# Altium PCB Demo.PcbDoc
Units mil, origin at the board's own origin, x right, y up, seen from the top; angles counter-clockwise.
Board outline 1205.03 x 1440.03 mil, 2 copper layers (Top Layer, Bottom Layer); 33 components, 22 nets, 134 pads, 9 vias.
Unrouted connection lines stored in the file: 21.
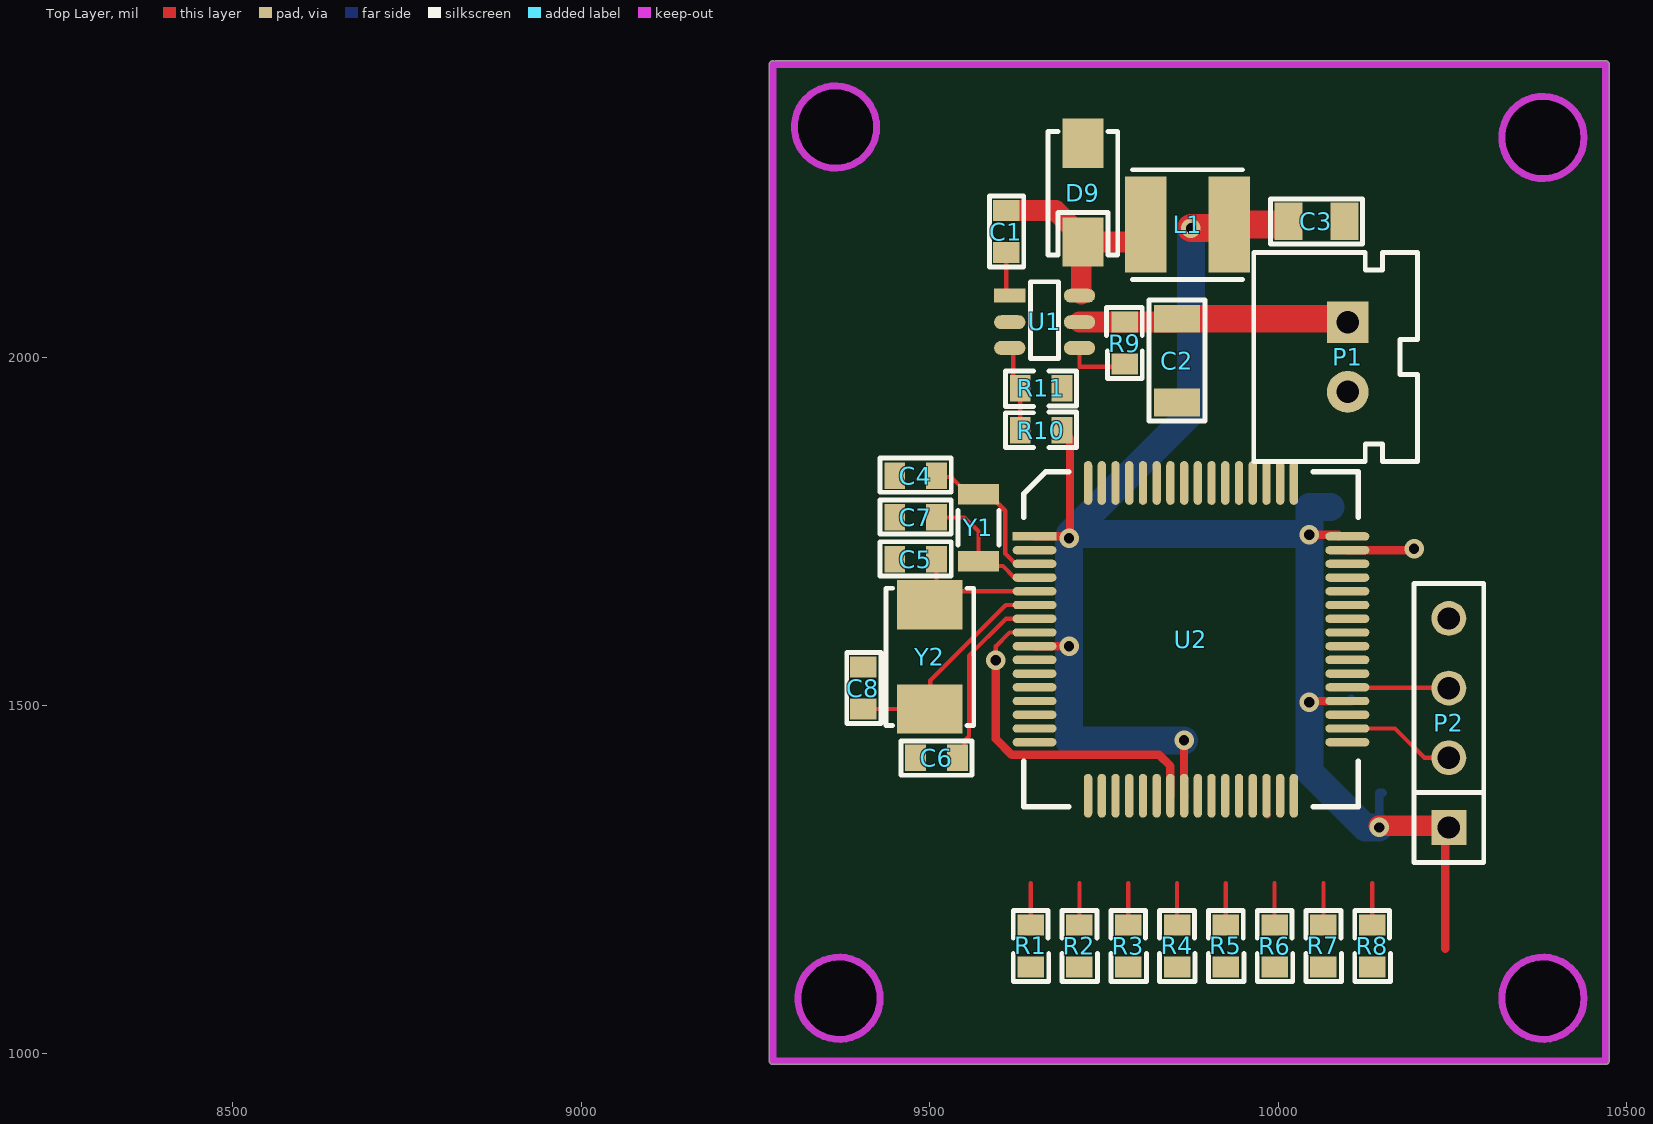
[diagram p0: Top Layer view]
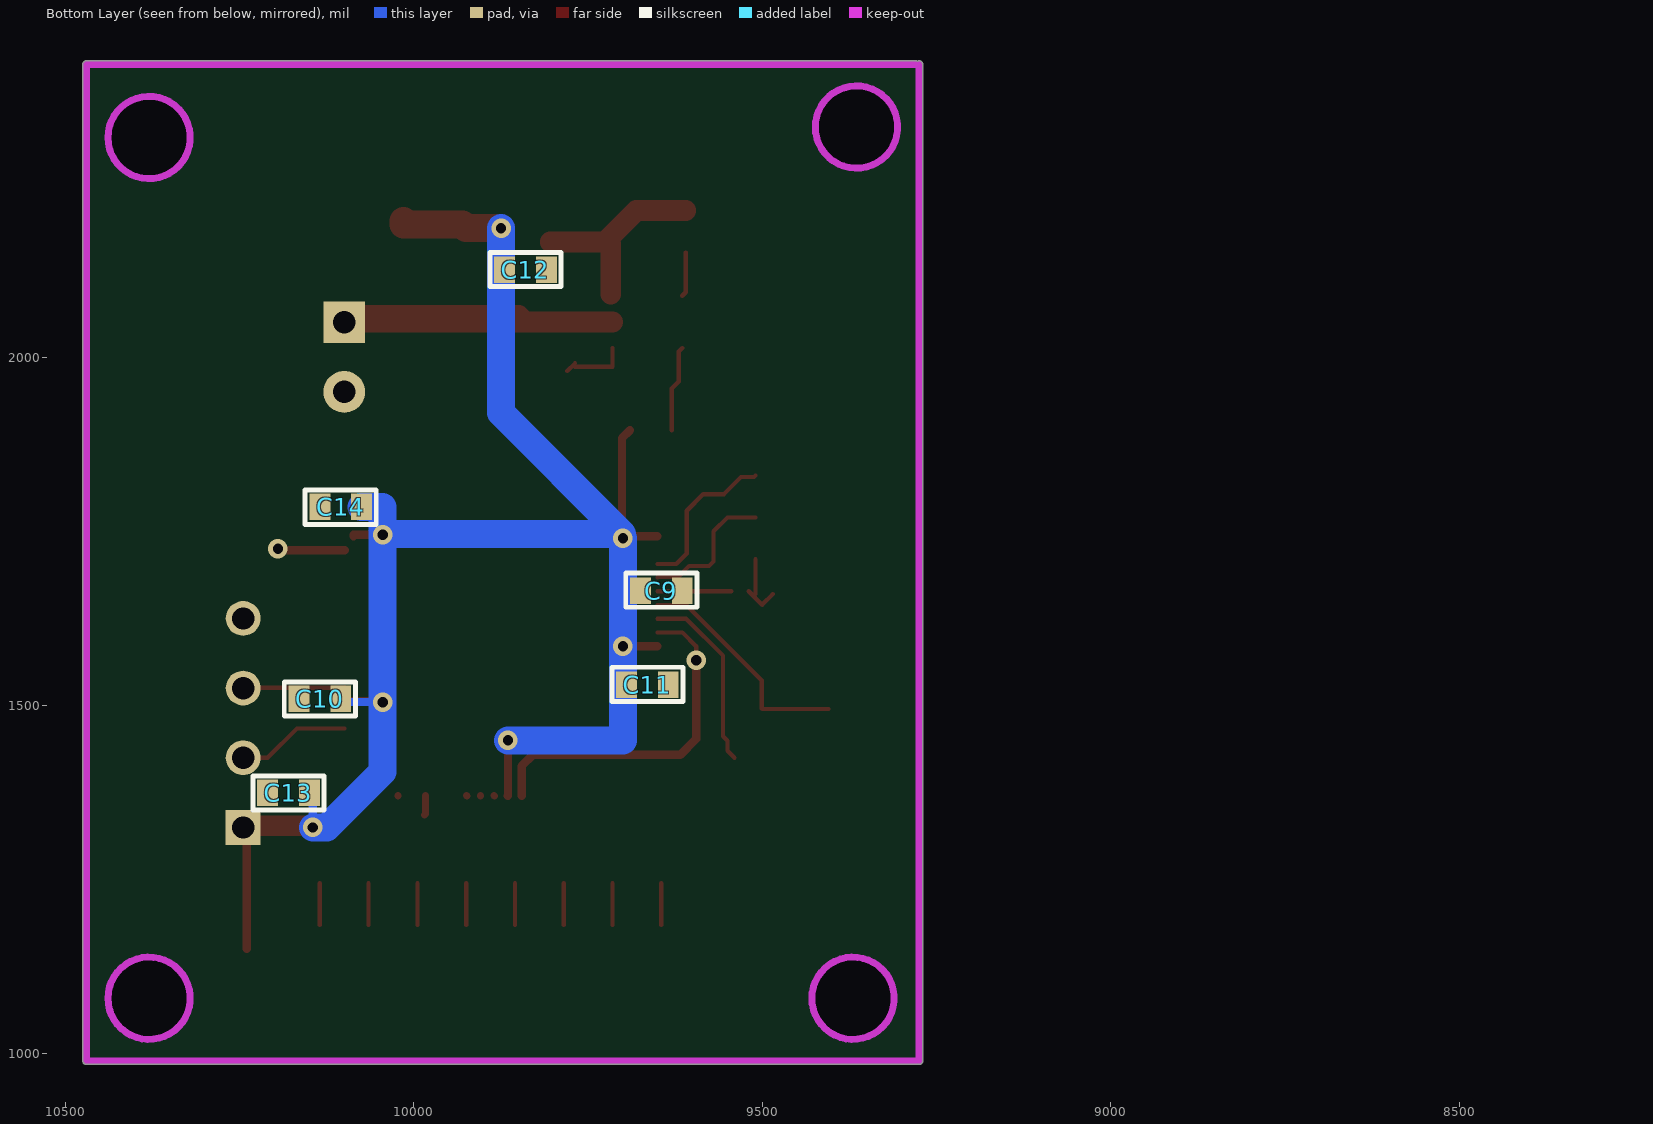
[diagram p1: Bottom Layer view, seen from below]
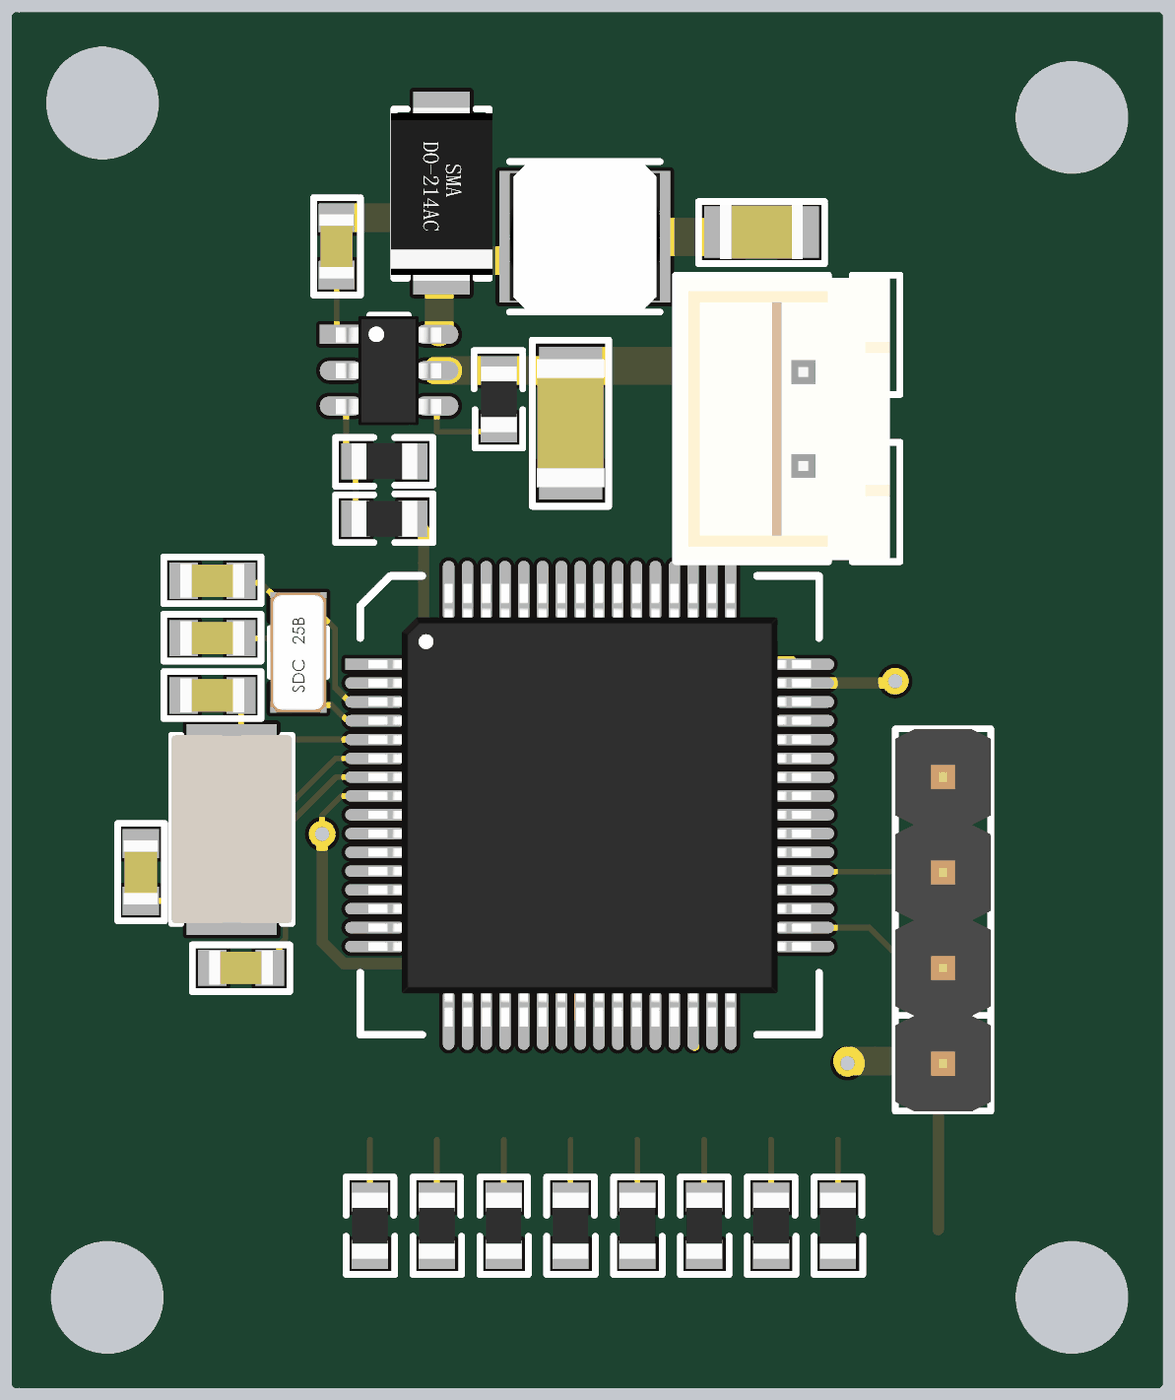
[diagram p2: 3D render of the assembled board from above, using the file's embedded part models]
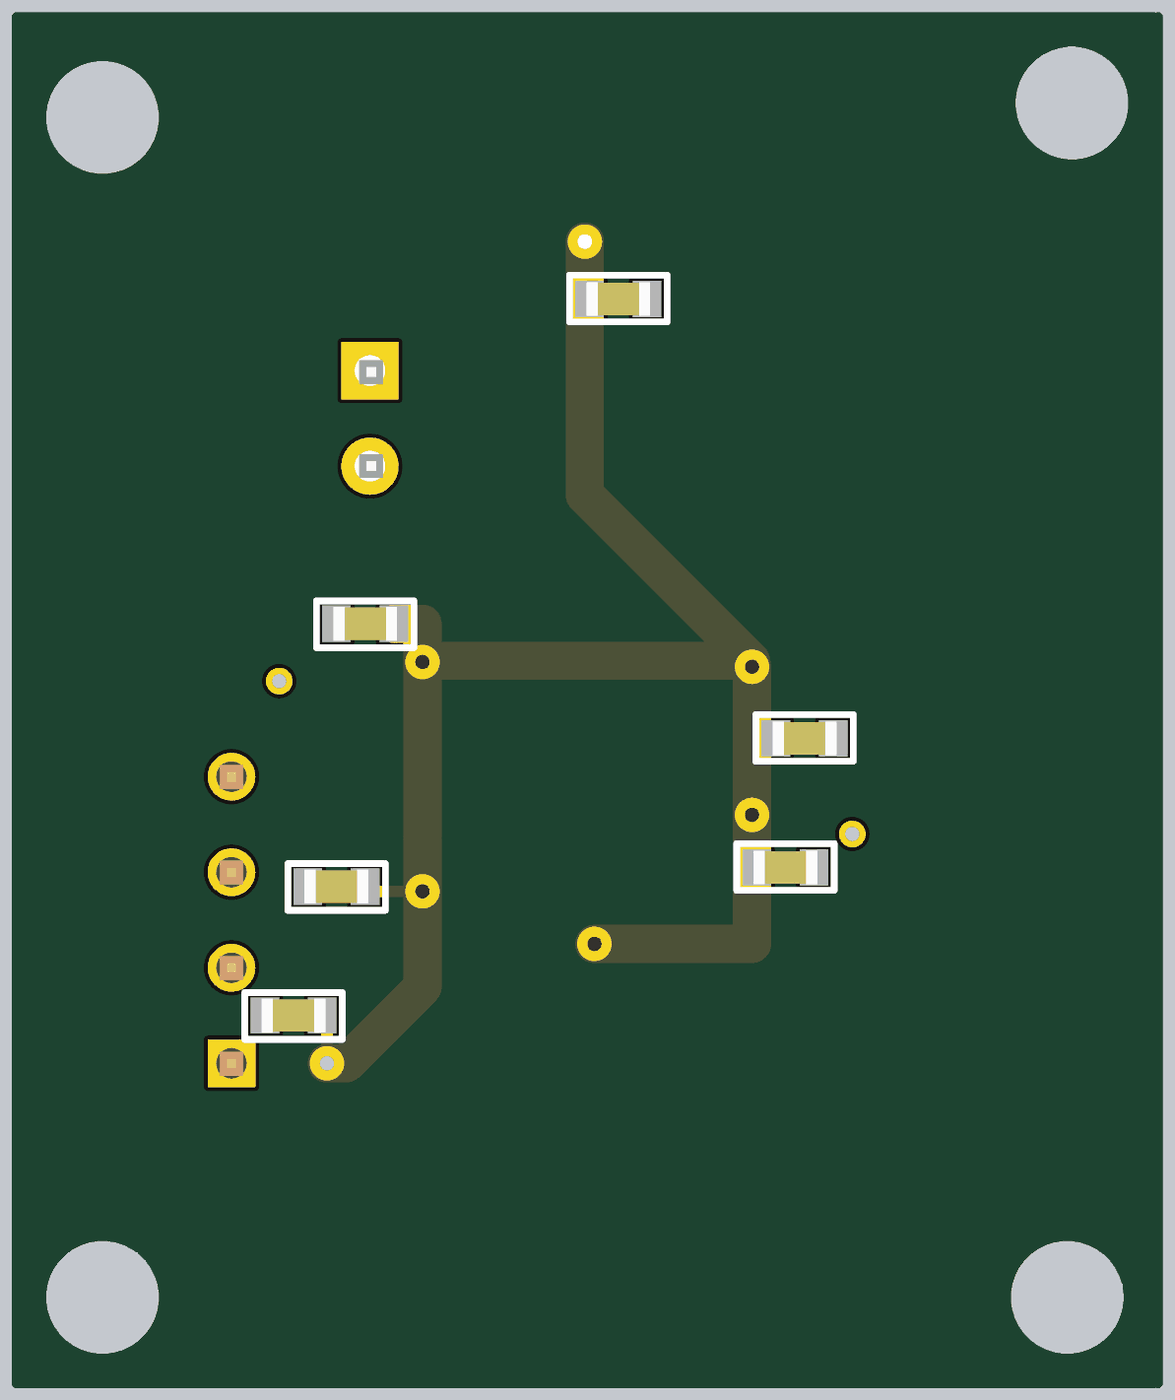
[diagram p3: 3D render of the assembled board from below, using the file's embedded part models]

## Layer stack, top to bottom
Top Solder: solder mask 0.4, Solder Resist, Dk 3.5
Top Layer: signal copper 1.4
Dielectric 1: dielectric 12.6, FR-4, Dk 4.8
Bottom Layer: signal copper 1.4
Bottom Solder: solder mask 0.4, Solder Resist, Dk 3.5

## Board outline
9269.99,990 ccw(c9275,990) 9277.5,985.65 ccw(c9280,990) 9280,984.99 10470,984.99 ccw(c10470,990) 10475.02,990 10475.01,2420 ccw(c10470,2420) 10470,2425.01 9280,2425.01 ccw(c9280,2420) 9277.5,2424.35 ccw(c9275,2420) 9269.99,2420
cut-out: 10320.94,1080 ccw(c10380,1080) 10380,1020.94 ccw(c10380,1080) 10439.06,1080 ccw(c10380,1080) 10380,1139.06 ccw(c10380,1080)
cut-out: 9310.94,1080 ccw(c9370,1080) 9370,1020.94 ccw(c9370,1080) 9429.06,1080 ccw(c9370,1080) 9370,1139.06 ccw(c9370,1080)
cut-out: 9305.94,2330 ccw(c9365,2330) 9365,2270.94 ccw(c9365,2330) 9424.06,2330 ccw(c9365,2330) 9365,2389.06 ccw(c9365,2330)
cut-out: 10320.94,2315 ccw(c10380,2315) 10380,2255.94 ccw(c10380,2315) 10439.06,2315 ccw(c10380,2315) 10380,2374.06 ccw(c10380,2315)

## Design rules (kind name [scope] priority, off if disabled: settings)
Clearance [All] p1: gap=6 ignorepadtopadclearanceinfootprint=FALSE
MinimumSolderMaskSliver [All] p1 off: minsoldermaskwidth=10
PolygonConnect [All] p1: connectstyle=Relief reliefconductorwidth=10 reliefentries=4 polygonreliefangle="90 Angle" airgapwidth=10
RoutingVias [All] p1: holewidth=28 width=50 viastyle="Through Hole" minholewidth=28 minwidth=50 maxholewidth=28 maxwidth=50
SilkToSilkClearance [All] p1 off: silktosilkclearance=10
SilkToSolderMaskClearance [IsPad] p1 off: minsilkscreentomaskgap=10 clearancetoexposedcopper=TRUE
SolderMaskExpansion [All] p1: expansion=4 istentingtop=FALSE
Width [All] p1: maxlimit=100 minlimit=6 preferedwidth=10
27 further rules are at their usual default settings.

## Components (designator, comment, footprint, x,y, rotation, side; value= is the part's Value field where it differs from the comment)
C1 "103" C0603 9610,2150 r90 top
C2 "475" C1206 9855,1935 r90 top value=100pF
C3 "226" C0805 10095,2195 r180 top value=100pF
C4 "475" C0603 9510,1830 r180 top
C5 "475" C0603 9510,1710 r180 top
C6 "104" C0603 9480,1425 r0 top
C7 "475" C0603 9510,1770 r180 top
C8 "475" C0603 9405,1495 r90 top
C9 "104" C0603 9615,1665 r0 bottom
C10 "104" C0603 10165,1510 r180 bottom
C11 "104" C0603 9635,1530 r0 bottom
C12 "104" C0603 9810,2125 r0 bottom
C13 "104" C0603 10210,1375 r180 bottom
C14 "104" C0603 10135,1785 r180 bottom
D9 "B230A" SMA 9720,2306.73 r270 top
L1 "4u7H" L4X4 9810,2190 r0 top
P1 "Header 2" XH2P54P2 10100,2050 r0 top
P2 "Header 4" SIP4 10245,1325 r90 top
R1 "360R" R0603 9645,1185 r270 top value=1K
R2 "360R" R0603 9715,1185 r270 top value=1K
R3 "360R" R0603 9785,1185 r270 top value=1K
R4 "360R" R0603 9855,1185 r270 top value=1K
R5 "360R" R0603 9925,1185 r270 top value=1K
R6 "360R" R0603 9995,1185 r270 top value=1K
R7 "360R" R0603 10065,1185 r270 top value=1K
R8 "360R" R0603 10135,1185 r270 top value=1K
R9 "100K" R0603 9780,1990 r90 top
R10 "49K9" R0603 9630,1895 r0 top value=1K
R11 "16K2" R0603 9690,1955 r180 top value=1K
U1 "MP2359" SOT23-6 9615.17,2087.8 r0 top
U2 "STM32F103C8TX" LQFP64 9875,1595 r0 top
Y1 "32768" FC-135 9570,1755 r90 top
Y2 "8M" CY5032 9500.27,1495 r90 top

## Footprints (in the part's own frame and the unit in brackets; to place one, negate y for a bottom-side part, rotate by r counter-clockwise, add the part's x,y. Pads: shape width x height; smd on the part's side, far side on the other; paste and mask are expansions set on the pad)
C0603 [mil]
  rect 30x38 smd: 1(0,0) 2(60,0)
  silkscreen extent -21,-25 81,24, body extent -3,-18 63,18, height 35
C0805 [mil]
  rect 40x54 smd: 1(0,0) 2(80,0)
  silkscreen extent -26,-32 106,33, body extent -3,-29 83,29, height 53
C1206 [mil]
  rect 40x66 smd: 1(0,0) 2(120,0)
  silkscreen extent -27,-40 147,40, body extent -7,-35 127,35, height 39
CY5032 [mm]
  rect 1.8x2.4 smd: 1(0,0) 2(3.8,0)
  silkscreen extent -0.6,-1.6 4.4,1.6, body extent -0.59,-1.6 4.41,1.6, height 1.23
FC-135 [mm]
  rect 0.75x1.5 smd: 1(-1.225,0) 2(1.225,0)
  silkscreen extent -0.64,-0.75 0.64,0.75, body extent -1.6,-0.75 1.6,0.75
L4X4 [mm]
  rect 1.5x3.5 smd: 1(0,0) 2(3.048,0)
  silkscreen extent -0.48,-2 3.52,2, body extent -0.48,-2 3.52,2, height 1.02
LQFP64 [mm]
  rect 1.6x0.305 smd: 1(-5.7,3.75)
  oval 1.6x0.305 smd: 2(-5.7,3.25) 3(-5.7,2.75) 4(-5.7,2.25) 5(-5.7,1.75) 6(-5.7,1.25) 7(-5.7,0.75) 8(-5.7,0.25) 9(-5.7,-0.25) 10(-5.7,-0.75) 11(-5.7,-1.25) 12(-5.7,-1.75) 13(-5.7,-2.25) 14(-5.7,-2.75) 15(-5.7,-3.25) 16(-5.7,-3.75) 33(5.7,-3.75) 34(5.7,-3.25) 35(5.7,-2.75) 36(5.7,-2.25) 37(5.7,-1.75) 38(5.7,-1.25) 39(5.7,-0.75) 40(5.7,-0.25) 41(5.7,0.25) 42(5.7,0.75) 43(5.7,1.25) 44(5.7,1.75) 45(5.7,2.25) 46(5.7,2.75) 47(5.7,3.25) 48(5.7,3.75)
  oval 0.305x1.6 smd: 17(-3.75,-5.7) 18(-3.25,-5.7) 19(-2.75,-5.7) 20(-2.25,-5.7) 21(-1.75,-5.7) 22(-1.25,-5.7) 23(-0.75,-5.7) 24(-0.25,-5.7) 25(0.25,-5.7) 26(0.75,-5.7) 27(1.25,-5.7) 28(1.75,-5.7) 29(2.25,-5.7) 30(2.75,-5.7) 31(3.25,-5.7) 32(3.75,-5.7) 49(3.75,5.7) 50(3.25,5.7) 51(2.75,5.7) 52(2.25,5.7) 53(1.75,5.7) 54(1.25,5.7) 55(0.75,5.7) 56(0.25,5.7) 57(-0.25,5.7) 58(-0.75,5.7) 59(-1.25,5.7) 60(-1.75,5.7) 61(-2.25,5.7) 62(-2.75,5.7) 63(-3.25,5.7) 64(-3.75,5.7)
  silkscreen extent -6.1,-6.1 6.1,6.1, body extent -5.89,-5.89 5.89,5.89, height 1.5
R0603 [mil]
  rect 30x38 smd: 1(0,0) 2(60,0)
  silkscreen extent -21,-25 81,26, body extent -4,-19 64,19, height 22
SIP4 [mil]
  rect 50x50 hole 32: 1(0,0)
  round 50 hole 32: 2(100,0) 3(200,0) 4(300,0)
  silkscreen extent -50,-50 350,50, body extent -50,-50 350,50, height 337
SMA [mm]
  rect 1.8x1.5 smd: 1(0,0) 2(3.6,0)
  silkscreen extent -0.43,-1.27 4.07,1.27, body extent -0.47,-1.35 4.13,1.35, height 2.4
SOT23-6 [mil]
  rect 45x20 smd: 1(-0.17,0.2)
  oval 45x20 smd: 2(-0.17,-37.8) 3(-0.17,-74.8) 4(99.83,-74.8) 5(99.83,-37.8) 6(99.83,0.2)
  silkscreen extent 30,-90 70,20, body extent -6,-95 104,19, height 57
XH2P54P2 [mil]
  rect 60x60 hole 32: 1(0,0)
  round 60 hole 32: 2(0,-100)
  silkscreen extent -135,-200 100,100, body extent -135,-198 89,97, height 276

## Part data
C1 C2 C3 C4 C5 C6 C7 C8 C9 C10 C11 C12 C13 C14: library part Cap, "Capacitor", LatestRevisionDate=17-Jul-2002, LatestRevisionNote="Re-released for DXP Platform.", PackageDescription="Radial Cap, Thru-Hole; 2 Leads; 0.3 in Pin Spacing", PackageReference=RAD-0.3, Published=8-Jun-2000, Publisher="Altium Limited"
D9: library part "D Schottky", "Schottky Diode", Code_JEDEC=DO-214-AA, LatestRevisionDate=17-Jul-2002, LatestRevisionNote="Re-released for DXP Platform.", PackageDescription="DO-214-AA/SMB; 2 C-Bend Leads; Body 5.3 x 3.6 mm, inc. leads (LxW)", PackageReference=SMB, Published=8-Jun-2000, Publisher="Altium Limited"
L1: library part Inductor, "Inductor", Code_IEC=1005, Code_JEITA=0402, LatestRevisionDate=29-May-2009, LatestRevisionNote="IPC-7351 Footprint Added.", PackageDescription="Chip Inductor", PackageReference=0402-A, Published=8-Jun-2000, Publisher="Altium Limited"
P1: "Header, 2-Pin", LatestRevisionDate=17-Jul-2002, LatestRevisionNote="Re-released for DXP Platform.", Publisher="Altium Limited"
P2: "Header, 4-Pin", LatestRevisionDate=17-Jul-2002, LatestRevisionNote="Re-released for DXP Platform.", Publisher="Altium Limited"
R1 R2 R3 R4 R5 R6 R7 R8 R9 R10 R11: library part Res2, "Resistor", LatestRevisionDate=17-Jul-2002, LatestRevisionNote="Re-released for DXP Platform.", PackageDescription="Axial Device, Thru-Hole; 2 Leads; 0.4 in Pin Spacing", PackageReference=AXIAL-0.4, Published=8-Jun-2000, Publisher="Altium Limited"
U2: library part Component_1
Y1 Y2: library part XTAL, "Crystal Oscillator", LatestRevisionDate=17-Jul-2002, LatestRevisionNote="Re-released for DXP Platform.", PackageDescription="Crystal, Thru-Hole; 2 Leads; Body 3.1 x 8.2 mm (Dia.xH)", PackageReference=R38, Published=8-Jun-2000, Publisher="Altium Limited"

## Via types
v1: diameter 28, hole 15, Top Layer to Bottom Layer, 9 vias

## Nets (pads, with @x,y where several pads share a name; then routed paths per layer and width w, separated by ;. In a path a pad name is that pad's centre, name@x,y a point inside that pad or via, vN(x,y) a via of type N, cw(c..) or ccw(c..) an arc to the next point about the centre after c; other vN are vias at no path point)
3V3: C3.2 C9.2 C10.2 C11.2 C12.2 C13.2 C14.2 L1.2 P2.1 R10.2 U2.1 U2.9 U2.24 U2.36 U2.48 | length 2817.9
  Top Layer w12: U2.9 9699.84,1585.16 v1(9700,1585) ; U2.1 v1@9697.64,1742.64 ; R10.2 9701.32,1883.68 v1@9701.32,1746.32 ; v1(9865,1450) 9865,1370.75 U2.24 ; v1(10045,1745) 10086.66,1745 U2.48@10086.66,1742.64 ; v1@10046.42,1506.42 U2.36 ; 10240,1151 P2.1@10240,1327.5
  Top Layer w30: v1@10145,1327.5 P2.1@10240,1327.5
  Top Layer w40: v1(9875,2185) 9925,2185 L1.2 10015,2190 C3.2
  Bottom Layer w12: v1(10045,1505) 10105,1505 C10.2 ; v1(10145,1325) 10145,1375 C13.2
  Bottom Layer w40: v1(9700,1740) v1(9700,1585) 9700,1450 v1(9865,1450) ; v1(9875,2185) 9875,1920 9701.32,1746.32 10043.68,1746.32 v1(10045,1745) ; C14.2 10045,1785 v1(10045,1745) ; v1(10145,1325) 10125,1325 10045,1405 v1(10045,1505) v1(10045,1745)
GND: C2.1 C3.1 C4.2 C5.2 C6.1 C7.2 C8.2 C9.1 C10.1 C11.1 C12.1 C13.1 C14.1 D9.1 P1.2 P2.4 R11.1 U1.2 U2.8 U2.23 U2.35 U2.44 U2.47 | length 602.3
  Top Layer w6: v1(9595,1565) 9595,1585 9614.84,1604.84 U2.8
  Top Layer w12: v1(9595,1565) 9595,1452 9617.64,1429.36 9829.17,1429.36 9845.47,1413.06 U2.23 ; U2.47 10192.95,1722.95 v1(10195,1725)
LED0: U2.25 | length 0.5
  Top Layer w10: U2.25@9884.46,1370.21 U2.25
LED1: U2.26 | length 0.5
  Top Layer w10: U2.26@9904.15,1370.21 U2.26
LED2: U2.27 | length 0.5
  Top Layer w10: U2.27@9923.83,1370.21 U2.27
LED3: U2.28
LED4: U2.29
LED5: U2.30 | length 28.5
  Top Layer w10: U2.30 9983.27,1344.55 U2.30@9985,1342.82
LED6: U2.31
LED7: U2.32 | length 0.5
  Top Layer w10: U2.32 U2.32@10023.02,1370.21
NetC1_1: C1.1 U1.1 | length 64.1
  Top Layer w6: C1.1 9610,2093 U1.1
NetC1_2: C1.2 D9.2 L1.1 U1.6 | length 291.9
  Top Layer w30: C1.2 9680.91,2210 9720,2170.91 D9.2 ; U1.6@9717.5,2090.5 9717.5,2162.5 D9.2 ; L1.1@9804.29,2165 D9.2
NetC6_2: C6.2 U2.7 | length 269.4
  Top Layer w6: C6.2 9550.17,1435.17 9550.17,1449.49 9556.52,1455.84 9556.52,1571.52 9609.53,1624.53 U2.7
NetR9_1: R9.1 U1.4 | length 96.6
  Top Layer w6: U1.4 9715,1986 R9.1@9769,1986 ; R9.1@9769,1991 R9.1@9780,1980
NetR10_1: R10.1 R11.2 U1.3 | length 124.2
  Top Layer w6: U1.3 9620,2008 9620,1965 R11.2 R10.1
OSC_IN: C5.1 U2.5 Y2.2 | length 205
  Top Layer w6: Y2.2@9485,1659.88 Y2.2 Y2.2@9519.57,1663.9 ; Y2.2@9510,1659.88 C5.1 ; Y2.2@9544.57,1663.9 U2.5
OSC_OUT: C8.1 U2.6 Y2.1 | length 331
  Top Layer w6: C8.1 Y2.1 9500.92,1495.64 9500.92,1535.92 9609.21,1644.21 U2.6
PC14-OSC32_IN(5): C4.1 U2.3 Y1.2 | length 228.9
  Top Layer w6: C4.1 9512.02,1827.98 9530.49,1827.98 9555.24,1803.23 9584.76,1803.23 9608.53,1779.46 9608.53,1718.31 9623.57,1703.27 U2.3
"PC15- OSC32_OUT(5)": C7.1 U2.4 Y1.1 | length 201.7
  Top Layer w6: C7.1 9550,1770 9570,1750 Y1.1 9576.78,1699.99 9605.01,1699.99 9620.27,1684.73 9649.44,1684.73 U2.4
SYS_JTCK_SWCLK: P2.3 U2.37 | length 145.8
  Top Layer w6: U2.37 10099.96,1525.55 P2.3@10245,1525.55
SYS_JTMS_SWDIO: P2.2 U2.34 | length 163
  Top Layer w6: U2.34 10167.95,1467.05 10210,1425 P2.2
VCC: C2.2 P1.1 R9.2 U1.5 | length 387.1
  Top Layer w30: U1.5 R9.2 C2.2@9850,2050 ; C2.2@9845,2055 C2.2@9850,2060
  Top Layer w40: C2.2 P1.1@10100,2055
pads on no net: R1.1 R1.2 R2.1 R2.2 R3.1 R3.2 R4.1 R4.2 R5.1 R5.2 R6.1 R6.2 R7.1 R7.2 R8.1 R8.2 U2.2 U2.10 U2.11 U2.12 U2.13 U2.14 U2.15 U2.16 U2.17 U2.18 U2.19 U2.20 U2.21 U2.22 U2.33 U2.38 U2.39 U2.40 U2.41 U2.42 U2.43 U2.45 U2.46 U2.49 U2.50 U2.51 U2.52 U2.53 U2.54 U2.55 U2.56 U2.57 U2.58 U2.59 U2.60 U2.61 U2.62 U2.63 U2.64
copper on no net: | length 480
  Top Layer w6: 9645,1185 9645,1245 ; 9715,1185 9715,1245 ; 9785,1185 9785,1245 ; 9855,1185 9855,1245 ; 9925,1185 9925,1245 ; 9995,1185 9995,1245 ; 10065,1185 10065,1245 ; 10135,1185 10135,1245

## Polygon pours and split planes (outlines as drawn)
no net on Bottom Layer "NONET_L02_P001" (solid, pour order 1): 9275,2420
no net on Bottom Layer "NONET_L02_P000" (solid, pour order 0): 9280,2420

## Keep-outs
Keep-Out Layer:
  circle w10: c10380,1080 r59.06
  circle w10: c9370,1080 r59.06
  circle w10: c10380,2315 r59.06
  circle w10: c9365,2330 r59.06
  lines w10: 9275,2420 9275,990 10470,990 10470,2420 9280,2420

## Other copper
Top Layer:
  pour cut-out: 8285,2260